# Altium PCB 矩形板V6.0(可制造).pcbdoc (part 1 of 2)
Units mil, origin at the board's own origin, x right, y up, seen from the top; angles counter-clockwise.
Board outline 3015.63 x 3960.03 mil, 2 copper layers (Top Layer, Bottom Layer); 162 components, 167 nets, 711 pads, 292 vias.
Unrouted connection lines stored in the file: 13.
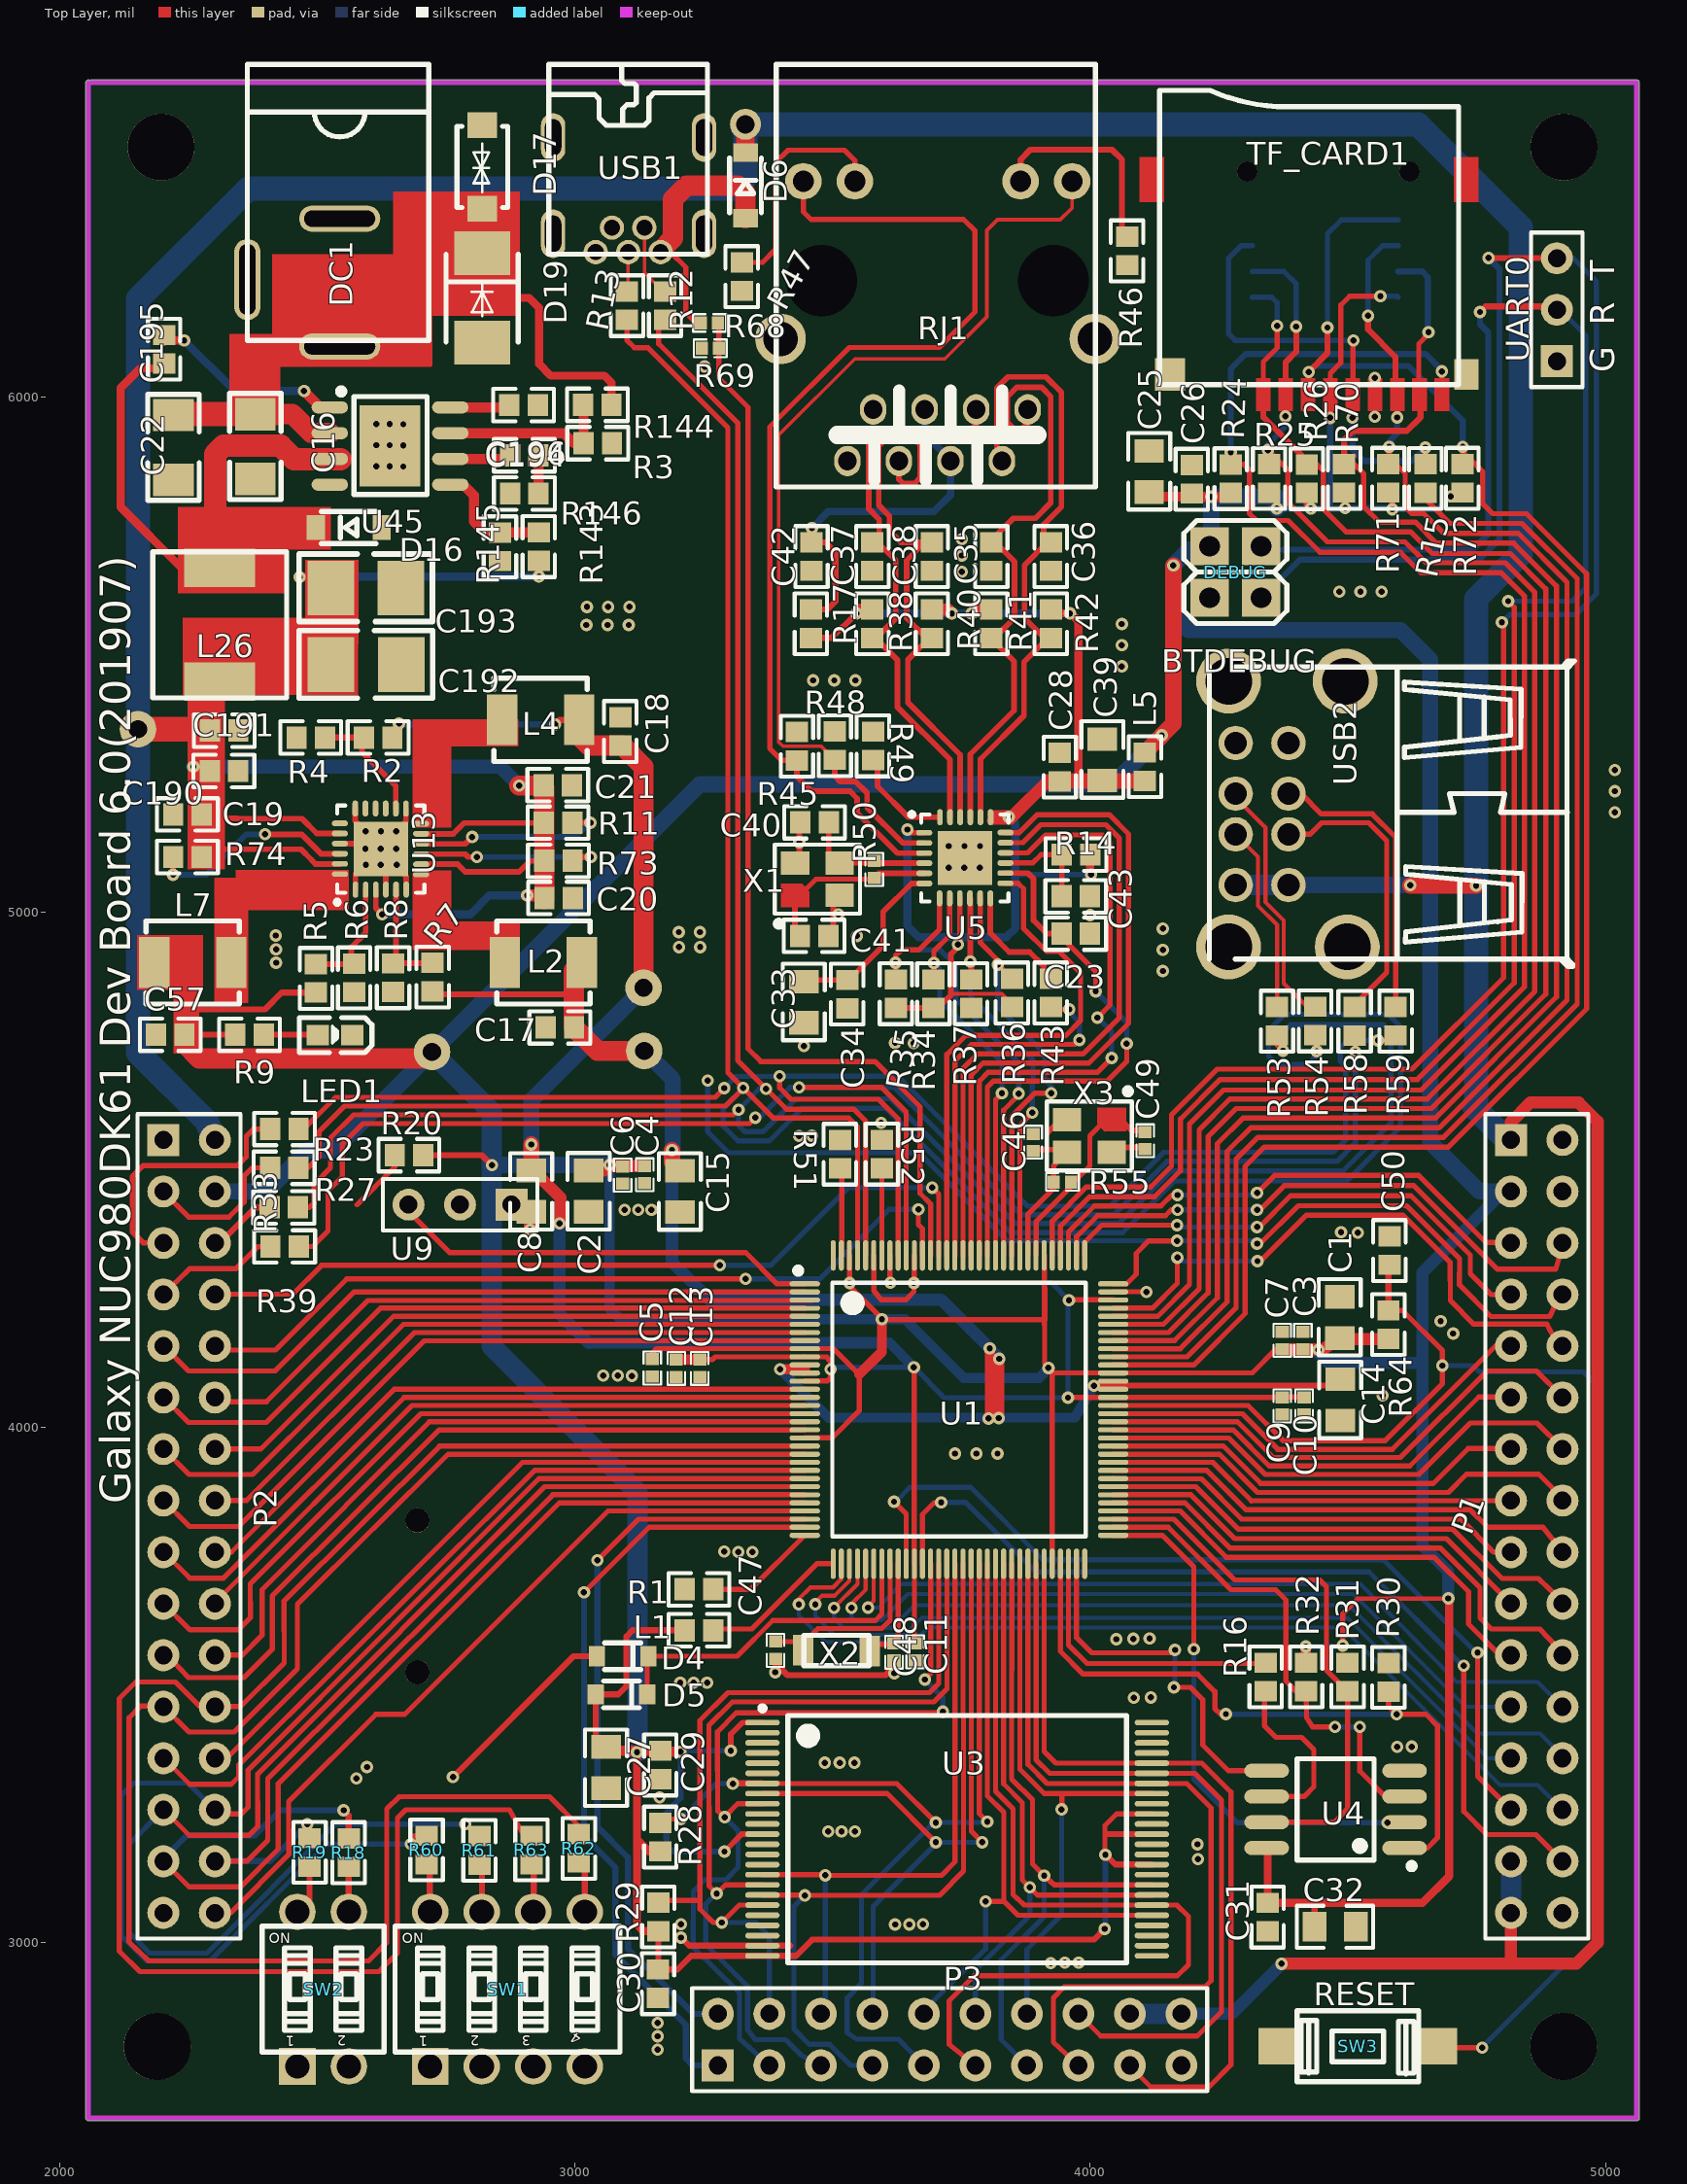
[diagram p0: Top Layer view]
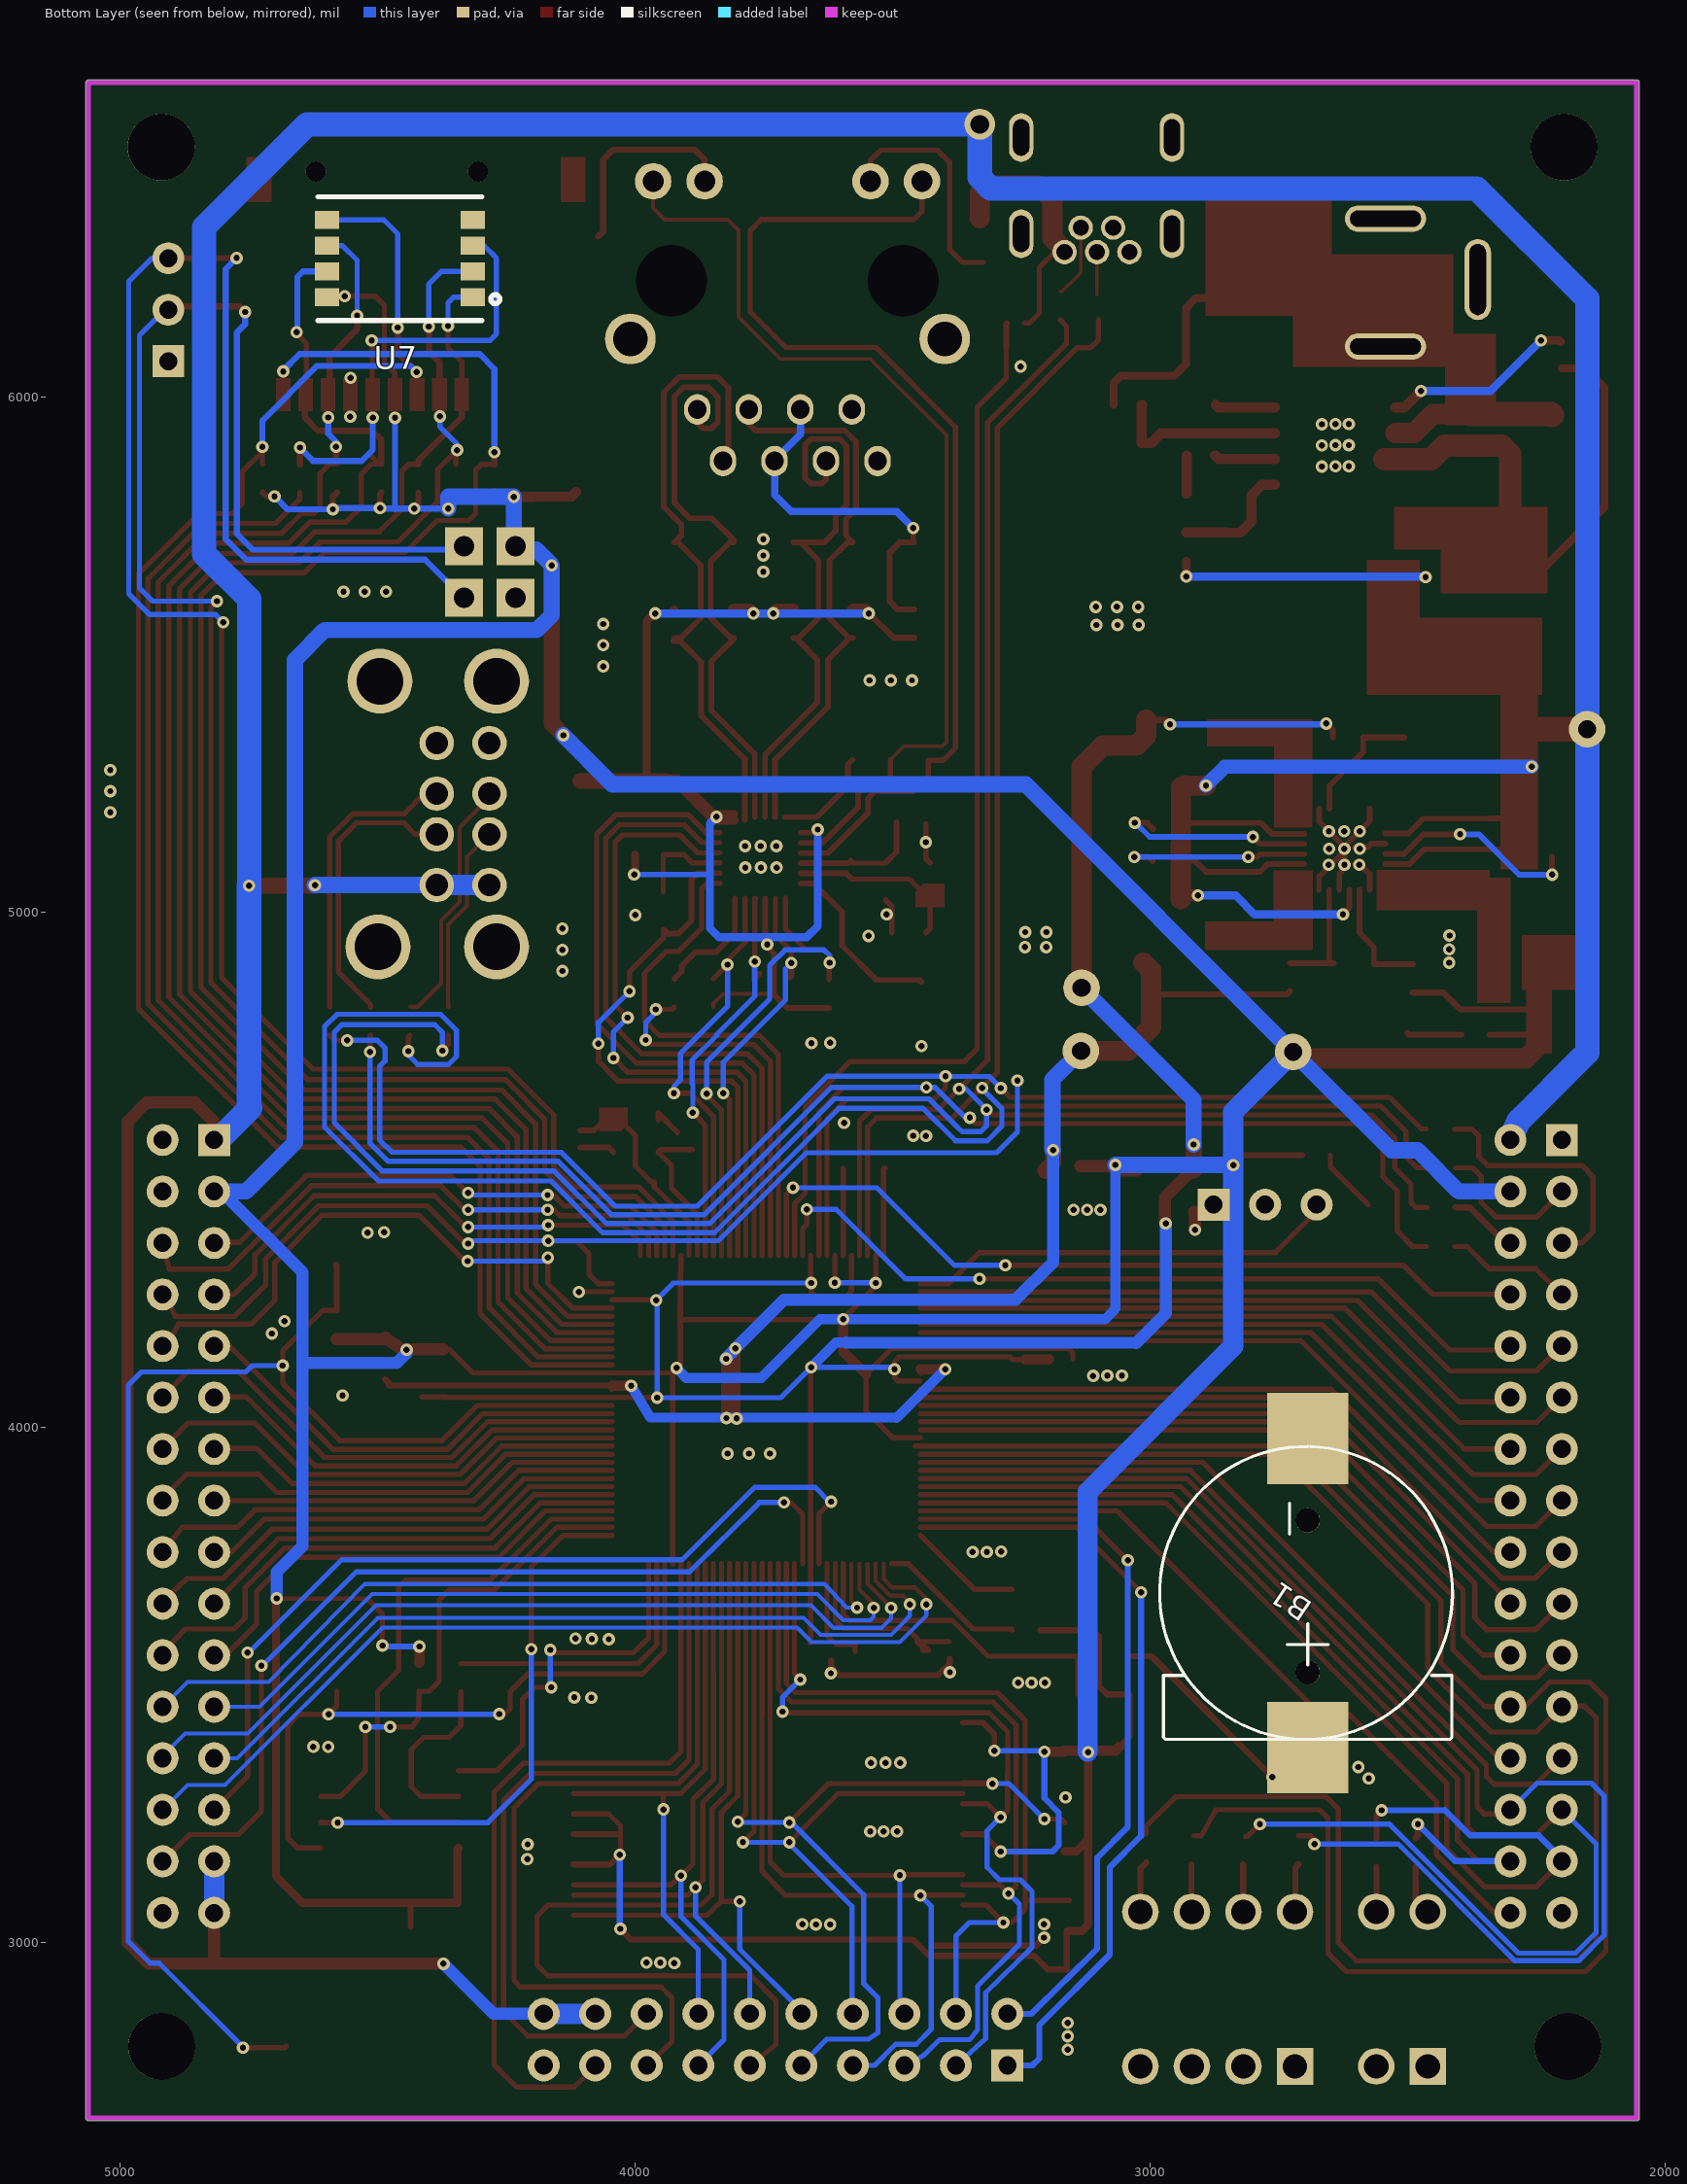
[diagram p1: Bottom Layer view, seen from below]

## Layer stack, top to bottom
Top Solder: solder mask 0.4, Solder Resist, Dk 3.5
Top Layer: signal copper 1.4
Dielectric1: dielectric 12.6, FR-4, Dk 4.8
Bottom Layer: signal copper 1.4
Bottom Solder: solder mask 0.4, Solder Resist, Dk 3.5

## Board outline
2055.22,2655.07 cw(c2055.22,2660.08) 2050.21,2660.08 2050.21,6610.08 cw(c2055.22,6610.08) 2057.72,6614.43 cw(c2060.22,6610.08) 2060.22,6615.1 5060.82,6615.1 cw(c5060.82,6610.08) 5065.84,6610.08 5065.84,2660.08 cw(c5060.82,2660.08) 5060.82,2655.07

## Design rules (kind name [scope] priority, off if disabled: settings)
Clearance [All] p1: gap=5
ComponentClearance [All] p1: gap=0 collisioncheckmode=3 verticalgap=0 showdistances=FALSE
HoleToHoleClearance [All] p1: gap=0 allowstackedmicrovias=TRUE
MinimumSolderMaskSliver [All] p1: minsoldermaskwidth=0
PolygonConnect [All] p1: connectstyle=Relief reliefconductorwidth=10 reliefentries=4 polygonreliefangle="90 Angle" airgapwidth=10
RoomDefinition 电源单元 [InComponentClass('电源单元')] p1: confinementstyle=ConfineOut formatcopy=TRUE lockcomponents=FALSE outline 6895,5570 8895,5570 8895,6570 6895,6570
RoomDefinition 接口单元 [InComponentClass('接口单元')] p2: confinementstyle=ConfineOut formatcopy=TRUE lockcomponents=FALSE outline 6710,4015 8710,4015 8710,5015 6710,5015
RoomDefinition 存储单元 [InComponentClass('存储单元')] p3: confinementstyle=ConfineOut formatcopy=TRUE lockcomponents=FALSE outline 6770,2645 8770,2645 8770,3645 6770,3645
RoomDefinition 以太网单元 [InComponentClass('以太网单元')] p4: confinementstyle=ConfineOut formatcopy=TRUE lockcomponents=FALSE outline 6745,1385 8745,1385 8745,2385 6745,2385
RoomDefinition 主控单元 [InComponentClass('主控单元')] p5: confinementstyle=ConfineOut formatcopy=TRUE lockcomponents=FALSE outline 6640,6930 8640,6930 8640,7930 6640,7930
RoutingVias [All] p1: holewidth=28 width=50 viastyle="Through Hole" minholewidth=10 minwidth=10 maxholewidth=28 maxwidth=50
SilkToSilkClearance [All] p1: silktosilkclearance=0
SilkToSolderMaskClearance [IsPad] p1: minsilkscreentomaskgap=0 clearancetoexposedcopper=TRUE
SolderMaskExpansion [All] p1: expansion=4
Width [All] p1: maxlimit=120 minlimit=7 preferedwidth=10
25 further rules are at their usual default settings.

## Classes and differential pairs
component class 主控单元: B1 C1 C2 C3 C4 C5 C6 C7 C8 C9 C10 C11 C12 C13 C14 C15 C46 C47 C48 C49 C50 D4 D5 D6 DEBUG L1 R1 R12 R13 R18 R19 R51 R52 R55 R60 R61 R62 R63 R64 R68 R69 SW1 SW2 SW3 U1 UART0 USB1 X2 X3
component class 以太网单元: C23 C28 C33 C34 C35 C36 C37 C38 C39 C40 C41 C42 C43 L5 R14 R17 R34 R35 R36 R37 R38 R40 R41 R42 R43 R45 R46 R47 R48 R49 R50 RJ1 U5 X1
component class 存储单元: C25 C26 C27 C29 C30 C31 C32 R15 R16 R24 R25 R26 R28 R29 R30 R31 R32 R70 R71 R72 TF_CARD1 U2 U3 U4 U7
component class 接口单元: P1 P2 P3 P4 R20 R23 R27 R33 R39 R53 R54 R58 R59 U9 USB2
component class 电源单元: C16 C17 C18 C19 C20 C21 C22 C57 C190 C191 C192 C193 C194 C195 C196 D16 D17 D19 DC1 L2 L4 L7 L26 LED1 R2 R3 R4 R5 R6 R7 R8 R9 R11 R73 R74 R143 R144 R145 R146 U13 U45

## Components (designator, comment, footprint, x,y, rotation, side; value= is the part's Value field where it differs from the comment)
B1 "CR1220-2" BATTERY-2 2693.93,3678.93 r270 bottom
C1 "10uF" 0805 4484.32,4213.53 r270 top
C2 "10uF" 0805 3026.29,4458.89 r90 top
C3 "100nF" 0402 4412.82,4168.69 r270 top
C4 "100nF" 0402 3134.87,4490.74 r90 top
C5 "100nF" 0402 3149.83,4115.94 r90 top
C6 "100nF" 0402 3092.35,4489.95 r90 top
C7 "100nF" 0402 4372.66,4168.69 r270 top
C8 "10uF" 0805 2914.79,4458.85 r90 top
C9 "100nF" 0402 4372.66,4041.92 r90 top
C10 "100nF" 0402 4415.18,4041.92 r90 top
C11 "100nF" 0402 3660.07,3564.76 r90 top
C12 "100nF" 0402 3196.29,4115.15 r90 top
C13 "100nF" 0402 3241.96,4115.15 r90 top
C14 "10uF" 0805 4485.26,4053.73 r90 top
C15 "10uF" 0805 3203.38,4458.46 r90 top
C16 "10uF" 1206 2379.36,5903.73 r90 top
C17 "10uF" 0603 2970.3,4776.57 r0 top
C18 "22uF" 0603 3087.63,5350.97 r270 top
C19 "10uF" 0603 2247.48,5189.95 r0 top
C20 "10uF" 0603 2967.94,5027.75 r180 top
C21 "10uF" 0603 2966.37,5246.64 r180 top
C22 "10uF" 1206 2220.31,5902.15 r90 top
C23 "15pF" 0603 3971.88,4958.45 r180 top
C25 "10uF" 0805 4114.39,5855.47 r270 top
C26 "100nF" 0603 4197.07,5840.35 r270 top
C27 "10uF" 0805 3060.19,3340.1 r90 top
C28 "100nF" 0603 3940.78,5281.68 r270 top
C29 "100nF" 0603 3165.19,3345.1 r270 top
C30 "100nF" 0603 3160.86,2920.66 r90 top
C31 "100nF" 0603 4344.32,3049.8 r270 top
C32 "10uF" 0805 4475.42,3031.06 r0 top
C33 "10uF" 0805 3443.93,4825.54 r270 top
C34 "100nF" 0603 3528.18,4841.13 r270 top
C35 "10pF" 0603 3807.96,5690.34 r270 top
C36 "10pF" 0603 3923.45,5690.34 r270 top
C37 "10pF" 0603 3577,5690.34 r270 top
C38 "10pF" 0603 3692.48,5690.34 r270 top
C39 "10uF" 0805 4023.45,5296.02 r270 top
C40 "22pF" 0603 3464.79,5174.6 r180 top
C41 "22pF" 0603 3464.01,4954.12 r180 top
C42 "22nF" 0603 3458.89,5690.34 r270 top
C43 "100nF" 0603 3971.88,5030.9 r180 top
C46 "15pF" 0402 3889.2,4553.34 r270 top
C47 "15pF" 0402 3389.2,3567.91 r90 top
C48 "15pF" 0402 3619.12,3564.36 r90 top
C49 "15pF" 0402 4106.52,4556.88 r90 top
C50 "1uF" 0603 4580.78,4343.45 r270 top
C57 "10uF" 0603 2214.01,4762.4 r0 top
C190 "10nF" 0603 2318.34,5274.2 r0 top
C191 "100nF" 0603 2318.74,5352.55 r0 top
C192 "47uF" 1210 2594.32,5480.9 r0 top
C193 "47uF" 1210 2593.93,5629.32 r0 top
C194 "10nF" 0603 2899.83,5984.44 r180 top
C195 "10nF" 0603 2202.2,6092.71 r90 top
C196 "3.3nF" 0603 2901.41,5886.8 r180 top
D4 "1N4148WS T4" SOD-323 3092.35,3556.1 r0 top
D5 "1N4148WS T4" SOD-323 3089.99,3482.08 r0 top
D6 "DSK14" SOD-123 3330.54,6410.64 r270 top
D16 "SK34WA" SOD-123F 2560.46,5746.64 r180 top
D17 "SMAJ16CA_C152120" SMA(DO-214AC)-DOB 2819.91,6446.93 r270 top
D19 "BEP0300SC" SMB(DO-214AA) 2819.52,6192.3 r90 top
DC1 "DC005-2.5MM" DC-5020 2453.38,6222.23 r270 top
DEBUG "BTDEBUG" 4PINO 4331.72,5610.42 r180 top
L1 "0Ω" 0603 3240.42,3606.48 r0 top
L2 "1.5uH" L-SMD-4.1X4.6 2938.41,4902.55 r180 top
L4 "1uH" L-SMD-4.1X4.6 2932.9,5373.42 r180 top
L5 "220Ω" 0603 4106.12,5282.48 r270 top
L7 "1.5uH" L-SMD-4.1X4.6 2257.71,4902.55 r0 top
L26 "15uH" SMD-L-7.1X6.6 2310.07,5558.06 r0 top
LED1 "19-217/GHC-YR1S2/3T" LED-0603 2534.09,4761.61 r180 top
P1 "Header-Female-2.54_2x16" HDR-16X2/2.54#1 4916.76,3758.06 r270 top
P2 "Header-Female-2.54_2x16" HDR-16X2/2.54#2 2300.63,3758.07 r270 top
P3 "Header-Female-2.54_2x10" HDR-10X2/2.54 3727,2812 r0 top
R1 "0" 0603 3240.38,3686.02 r0 top
R2 "100K" 0603 2617.55,5339.16 r0 top
R3 "47K" 0603 3043.93,5910.42 r180 top
R4 "100K" 0603 2486.84,5339.16 r0 top
R5 "510K" 0603 2497.08,4871.84 r270 top
R6 "110K" 0603 2571.09,4872.63 r90 top
R7 "200K" 0603 2723.45,4874.2 r270 top
R8 "100K" 0603 2646.68,4873.02 r90 top
R9 "1K" 0603 2367.94,4762.39 r0 top
R11 "1K" 0603 2966.76,5173.81 r0 top
R12 "27" 0603 3174.64,6177.35 r270 top
R13 "27" 0603 3100.62,6177.35 r270 top
R14 "4.7K" 0603 3972.32,5111.98 r0 top
R15 "0" 0603 4650.61,5841.93 r90 top
R16 "0" 0603 4340.38,3515.94 r90 top
R17 "0" 0603 3457.71,5560.03 r270 top
R18 "10K" 0603 2560.46,3174.99 r270 top
R19 "10K" 0603 2484.48,3175.39 r270 top
R20 "10K" 0603 2677.39,4528.54 r0 top
R23 "4.7" 0603 2435.66,4579.32 r180 top
R24 "10K" 0603 4272.66,5841.53 r270 top
R25 "10K" 0603 4347.07,5841.93 r270 top
R26 "10K" 0603 4420.3,5841.52 r270 top
R27 "4.7" 0603 2435.27,4504.13 r0 top
R28 "100K" 0603 3165.19,3205.1 r270 top
R29 "100K" 0603 3161.49,3050.15 r90 top
R30 "10K" 0603 4578.96,3515.15 r90 top
R31 "10K" 0603 4499.44,3515.94 r90 top
R32 "10K" 0603 4419.12,3515.94 r90 top
R33 "4.7" 0603 2434.48,4427.35 r0 top
R34 "4.7K" 0603 3695.5,4841.92 r90 top
R35 "4.7K" 0603 3622.67,4841.92 r90 top
R36 "4.7K" 0603 3847.86,4843.49 r90 top
R37 "4.7K" 0603 3768.73,4841.92 r90 top
R38 "49.9" 0603 3577,5560.02 r90 top
R39 "4.7" 0603 2436.05,4351.37 r180 top
R40 "49.9" 0603 3692.48,5560.03 r90 top
R41 "49.9" 0603 3807.97,5560.03 r90 top
R42 "49.9" 0603 3923.45,5560.03 r90 top
R43 "510" 0603 3923.45,4843.49 r90 top
R45 "10K" 0603 3430.54,5322.23 r270 top
R46 "470" 0603 4071.48,6283.65 r90 top
R47 "470" 0603 3323.45,6233.65 r90 top
R48 "10K" 0603 3504.16,5323.41 r270 top
R49 "12.1K" 0603 3578.18,5323.02 r270 top
R50 "1M" 0402 3580.78,5083.21 r90 top
R51 "12.1K" 0603 3514.01,4530.5 r270 top
R52 "12.1K" 0603 3595.52,4530.68 r270 top
R53 "4.7" 0603 4362.43,4788.77 r270 top
R54 "4.7" 0603 4436.44,4789.16 r270 top
R55 "1M" 0402 3945.73,4476.57 r180 top
R58 "4.7" 0603 4513.22,4788.38 r270 top
R59 "4.7" 0603 4592.74,4788.77 r270 top
R60 "10K" 0603 2711.64,3180.11 r270 top
R61 "10K" 0603 2814.4,3179.32 r270 top
R62 "10K" 0603 3007.31,3183.26 r270 top
R63 "10K" 0603 2915.19,3180.11 r270 top
R64 "100K" 0603 4578.81,4199.75 r270 top
R68 "20K" 0402 3260.86,6143.89 r180 top
R69 "39K" 0402 3262.43,6094.67 r0 top
R70 "10K" 0603 4492.74,5842.32 r270 top
R71 "10K" 0603 4578.57,5842.32 r270 top
R72 "10K" 0603 4722.27,5842.31 r270 top
R73 "1K" 0603 2967.55,5099.79 r0 top
R74 "1K" 0603 2247.47,5107.27 r0 top
R143 "52.3K" 0603 2929.36,5709.64 r270 top
R144 "100K" 0603 3043.14,5984.83 r180 top
R145 "10K" 0603 2854.16,5709.24 r90 top
R146 "6.98K" 0603 2901.41,5812.78 r0 top
RJ1 "HR911105A" RJ45-LIGHT 3703.77,6147.35 r180 top
SW1 "NDI-04H-V" NDI-04H-V 2868.73,2910.03 r0 top
SW2 "NDI-02H-V" NDI-02H-V 2510.86,2910.03 r0 top
SW3 "RESET" KEY-TOUCH-SMD-6.0*3.5*H-(A) 4519.52,2799.01 r0 top
TF_CARD1 "TF_CARD" TF-115_MRS 4682.51,6004.52 r90 top
U1 "NUC980DK61Y" LQFP-128_14X14X04P 3745.11,4034.84 r0 top
U3 "MT29F2G08ABAEAWP-IT:E" TSOP-48 3741.56,3200.98 r90 top
U4 "W25Q128JVSIQTR" SOIC-8_208MIL 4476.21,3258.85 r180 top
U5 "LAN8720AI" QFN-24_4X4X05P 3756.53,5105.81 r0 top
U7 "MKDV4GIL-AS" LGA-8_8PIN-L6.10-W8.10-PITCH0.65-TL 4456.13,6268.69 r180 bottom
U9 "3pin插针" HDR-3X1/2.54 2776.61,4432.47 r180 top
U13 "EA3059C" QFN-24_4X4X05P 2622.16,5122.62 r90 top
U45 "MP2303ADN-LF-Z" SOIC-8_EP_150MIL 2640.78,5904.91 r0 top
UART0 "2.54排针 3pin" HDR-3X1/2.54 4905.73,6169.48 r90 top
USB1 "Mini USB-B 5P-Female-TH_C46398" USB-MINI-2 3103.77,6392.6 r180 top
USB2 "Double layer DIP 90° black" USB-M-51 4383.69,5190.74 r90 top
X1 "25MHz" OSC-YSX-3225_4P 3470.3,5064.36 r0 top
X2 "32.768KHz" SMD-3215_2P 3507.31,3567.12 r0 top
X3 "12MHz" OSC-YSX-3225_4P 3998.25,4565.95 r180 top

## Footprints (in the part's own frame and the unit in brackets; to place one, negate y for a bottom-side part, rotate by r counter-clockwise, add the part's x,y. Pads: shape width x height; smd on the part's side, far side on the other; paste and mask are expansions set on the pad)
4PINO [mil]
  rect 74x74 hole 40: a(0,0) b(100,0) c(0,-100) d(100,-100)
  silkscreen extent -50,-150 150,50
0402 [mil]
  rect 23.62x25.58 smd: 1(-16.7,0) 2(16.7,0)
  silkscreen extent -32,-17 32,17
0603 [mm]
  rect 1x1.1 smd: 1(-0.7,0) 2(0.7,0)
  silkscreen extent -1.5,-0.8 1.5,0.8
0805 [mm]
  rect 1.16x1.45 smd: 1(-1.016,0) 2(1.016,0)
  silkscreen extent -1.9,-1.03 1.87,1.04
1206 [mil]
  rect 63x78.74 smd: 1(-62.99,0) 2(62.99,0)
  silkscreen extent -103,-50 103,50
1210 [mil]
  rect 90.56x106.3 smd: 1(-68,0) 2(68,0)
  silkscreen extent -130,-65 129,66
BATTERY-2 [mm]
  round 1.2 hole 1.2: 0(-3.581,0) 0(3.912,0)
  rect 4.5x4 smd: 1(7.62,0) 2(-7.62,0)
  silkscreen extent -7.22,-7.3 7.22,7.14
DC-5020 [mm]
  oval 1.3x3.999 hole 0.8 slot 3.5 at 90 deg: 1(3.15,2.275) 2(-3.15,2.275)
  oval 3.999x1.3 hole 0.8 slot 3.5 at 0 deg: 3(-0.15,-2.275)
  silkscreen extent -10.75,-2.28 2.85,6.67
HDR-3X1/2.54 [mil]
  rect 62x62 hole 35: 1(-100,0)
  round 62 hole 35: 2(0,0) 3(100,0)
  silkscreen extent -150,-50 150,50
HDR-10X2/2.54 [mil]
  rect 62x62 hole 35: 1(-450,-50)
  round 62 hole 35: 2(-450,50) 3(-350,-50) 4(-350,50) 5(-250,-50) 6(-250,50) 7(-150,-50) 8(-150,50) 9(-50,-50) 10(-50,50) 11(50,-50) 12(50,50) 13(150,-50) 14(150,50) 15(250,-50) 16(250,50) 17(350,-50) 18(350,50) 19(450,-50) 20(450,50)
  silkscreen extent -500,-100 500,100
HDR-16X2/2.54#1 [mil]
  rect 62x62 hole 35: 1(-800,-100)
  round 62 hole 35: 2(-800,0) 3(-700,-100) 4(-700,0) 5(-600,-100) 6(-600,0) 7(-500,-100) 8(-500,0) 9(-400,-100) 10(-400,0) 11(-300,-100) 12(-300,0) 13(-200,-100) 14(-200,0) 15(-100,-100) 16(-100,0) 17(0,-100) 18(0,0) 19(100,-100) 20(100,0) 21(200,-100) 22(200,0) 23(300,-100) 24(300,0) 25(400,-100) 26(400,0) 27(500,-100) 28(500,0) 29(600,-100) 30(600,0) 31(700,-100) 32(700,0)
  silkscreen extent -850,-150 750,50
HDR-16X2/2.54#2 [mil]
  rect 62x62 hole 35 copper offset 0.02,-0.01: 1(-800,-100.01)
  round 62 hole 35: 2(-800,-0.01) 3(-700,-100.01) 4(-700,-0.01) 5(-600,-100.01) 6(-600,-0.01) 7(-500,-100.01) 8(-500,-0.01) 9(-400,-100.01) 10(-400,-0.01) 11(-300,-100.01) 12(-300,-0.01) 13(-200,-100.01) 14(-200,-0.01) 15(-100,-100.01) 16(-100,-0.01) 17(0,-100.01) 18(0,-0.01) 19(100,-100.01) 20(100,-0.01) 21(200,-100.01) 22(200,-0.01) 23(300,-100.01) 24(300,-0.01) 25(400,-100.01) 26(400,-0.01) 27(500,-100.01) 28(500,-0.01) 29(600,-100.01) 30(600,-0.01) 31(700,-100.01) 32(700,-0.01)
  silkscreen extent -850,-150 750,50
KEY-TOUCH-SMD-6.0*3.5*H-(A) [mm]
  rect 1.8x1.8 smd: 1(-4,0) 2(4,0)
  silkscreen extent -3,-1.75 3,1.75
L-SMD-4.1X4.6 [mm]
  rect 1.5x2.5 smd: 1(-1.9,0) 2(1.9,0)
  silkscreen extent -2.3,-2.05 2.3,2.05
LED-0603 [mil]
  rect 43x39 smd: 1(33.5,0) 2(-33.5,0)
  silkscreen extent -72,-34 70,34
LGA-8_8PIN-L6.10-W8.10-PITCH0.65-TL [mm]
  rect 1.2x0.9 smd: 1(3.6,-1.905) 2(3.6,-0.635) 3(3.6,0.635) 4(3.6,1.905) 5(-3.6,1.905) 6(-3.6,0.635) 7(-3.6,-0.635) 8(-3.6,-1.905)
  silkscreen extent -4.05,-3.05 4.92,3.05
LQFP-128_14X14X04P [mm]
  oval 1.5x0.25 smd: 1(-7.6,6.2) 2(-7.6,5.799) 3(-7.6,5.4) 4(-7.6,5.001) 5(-7.6,4.6) 6(-7.6,4.201) 7(-7.6,3.8) 8(-7.6,3.401) 9(-7.6,3) 10(-7.6,2.601) 11(-7.6,2.2) 12(-7.6,1.801) 13(-7.6,1.4) 14(-7.6,1.001) 15(-7.6,0.599) 16(-7.6,0.201) 17(-7.6,-0.201) 18(-7.6,-0.599) 19(-7.6,-1.001) 20(-7.6,-1.4) 21(-7.6,-1.801) 22(-7.6,-2.2) 23(-7.6,-2.601) 24(-7.6,-3) 25(-7.6,-3.401) 26(-7.6,-3.8) 27(-7.6,-4.201) 28(-7.6,-4.6) 29(-7.6,-5.001) 30(-7.6,-5.4) 31(-7.6,-5.799) 32(-7.6,-6.2) 65(7.6,-6.2) 66(7.6,-5.799) 67(7.6,-5.4) 68(7.6,-5.001) 69(7.6,-4.6) 70(7.6,-4.201) 71(7.6,-3.8) 72(7.6,-3.401) 73(7.6,-3) 74(7.6,-2.601) 75(7.6,-2.2) 76(7.6,-1.801) 77(7.6,-1.4) 78(7.6,-1.001) 79(7.6,-0.599) 80(7.6,-0.201) 81(7.6,0.201) 82(7.6,0.599) 83(7.6,1.001) 84(7.6,1.4) 85(7.6,1.801) 86(7.6,2.2) 87(7.6,2.601) 88(7.6,3) 89(7.6,3.401) 90(7.6,3.8) 91(7.6,4.201) 92(7.6,4.6) 93(7.6,5.001) 94(7.6,5.4) 95(7.6,5.799) 96(7.6,6.2)
  oval 0.25x1.5 smd: 33(-6.2,-7.6) 34(-5.799,-7.6) 35(-5.4,-7.6) 36(-5.001,-7.6) 37(-4.6,-7.6) 38(-4.201,-7.6) 39(-3.8,-7.6) 40(-3.401,-7.6) 41(-3,-7.6) 42(-2.601,-7.6) 43(-2.2,-7.6) 44(-1.801,-7.6) 45(-1.4,-7.6) 46(-1.001,-7.6) 47(-0.599,-7.6) 48(-0.201,-7.6) 49(0.201,-7.6) 50(0.599,-7.6) 51(1.001,-7.6) 52(1.4,-7.6) 53(1.801,-7.6) 54(2.2,-7.6) 55(2.601,-7.6) 56(3,-7.6) 57(3.401,-7.6) 58(3.8,-7.6) 59(4.201,-7.6) 60(4.6,-7.6) 61(5.001,-7.6) 62(5.4,-7.6) 63(5.799,-7.6) 64(6.2,-7.6) 97(6.2,7.6) 98(5.799,7.6) 99(5.4,7.6) 100(5.001,7.6) 101(4.6,7.6) 102(4.201,7.6) 103(3.8,7.6) 104(3.401,7.6) 105(3,7.6) 106(2.601,7.6) 107(2.2,7.6) 108(1.801,7.6) 109(1.4,7.6) 110(1.001,7.6) 111(0.599,7.6) 112(0.201,7.6) 113(-0.201,7.6) 114(-0.599,7.6) 115(-1.001,7.6) 116(-1.4,7.6) 117(-1.801,7.6) 118(-2.2,7.6) 119(-2.601,7.6) 120(-3,7.6) 121(-3.401,7.6) 122(-3.8,7.6) 123(-4.201,7.6) 124(-4.6,7.6) 125(-5.001,7.6) 126(-5.4,7.6) 127(-5.799,7.6) 128(-6.2,7.6)
  silkscreen extent -8.07,-6.25 6.25,7
NDI-02H-V [mm]
  rect 1.8x1.8 hole 1.2: 1(-1.27,-3.81)
  round 1.8 hole 1.2: 2(1.27,-3.81) 3(1.27,3.81) 4(-1.27,3.81)
  silkscreen extent -3.01,-3.1 3.01,3.1
NDI-04H-V [mm]
  rect 1.8x1.8 hole 1.2: 1(-3.81,-3.81)
  round 1.8 hole 1.2: 2(-1.27,-3.81) 3(1.27,-3.81) 4(3.81,-3.81) 5(3.81,3.81) 6(1.27,3.81) 7(-1.27,3.81) 8(-3.81,3.81)
  silkscreen extent -5.55,-3.1 5.55,3.1
OSC-YSX-3225_4P [mm]
  round 0 smd: 1(-1.1,-0.8)
  rect 1.4x1.15 smd: 2(1.1,-0.8) 3(1.1,0.8) 4(-1.1,0.8)
  Top Layer region: -1.8,-0.225 -0.762,-0.225 -0.4,-0.604 -0.4,-1.375 -1.8,-1.375
  silkscreen extent -2.1,-2.35 2.1,1.7
QFN-24_4X4X05P [mm]
  oval 0.796x0.28 smd: 1(-2,1.232) 2(-2,0.732) 3(-2,0.231) 4(-2,-0.267) 5(-2,-0.767) 6(-2,-1.267) 13(2,-1.257) 14(2,-0.757) 15(2,-0.257) 16(2,0.241) 17(2,0.742) 18(2,1.242)
  oval 0.28x0.796 smd: 7(-1.245,-2) 8(-0.744,-2) 9(-0.244,-2) 10(0.254,-2) 11(0.754,-2) 12(1.255,-2) 19(1.27,2) 20(0.77,2) 21(0.269,2) 22(-0.229,2) 23(-0.729,2) 24(-1.229,2)
  rect 2.68x2.68 smd: 25(0,-0.013)
  silkscreen extent -2.84,-2.16 2.15,2.35
RJ45-LIGHT [mm]
  oval 1.3x1.499 hole 0.914: 1(-4.445,4.355) 2(-3.175,6.895) 3(-1.905,4.355) 4(-0.635,6.895) 5(0.635,4.355) 6(1.905,6.895) 7(3.175,4.355) 8(4.445,6.895)
  round 1.8 hole 1.04: 9(-6.625,-6.895) 10(-4.085,-6.895) 11(4.085,-6.895) 12(6.625,-6.895)
  round 2.5 hole 1.702: 13(-7.75,0.875) 14(7.75,0.875)
  round 2 hole 3.5 unplated: 15(5.715,-1.995) 16(-5.715,-1.995)
  silkscreen extent -7.78,-12.65 7.96,8.18
SMA(DO-214AC)-DOB [mil]
  rect 50x57.9 smd: 1(-81,0) 2(81,0)
  silkscreen extent -78,-49 79,49
SMB(DO-214AA) [mil]
  rect 85x108 smd: 1(-87,0) 2(87,0)
  silkscreen extent -85,-70 85,70
SMD-3215_2P [mil]
  rect 39.37x60 smd: 1(-64.88,0.95) 2(64.88,-0.95)
  silkscreen extent -63,-30 63,29
SMD-L-7.1X6.6 [mm]
  rect 3.5x1.9 smd: 1(0,2.8) 2(0,-2.8)
  silkscreen extent -3.3,-3.6 3.3,3.6
SOD-123 [mil]
  rect 35.8x48 smd: 1(64,0) 2(-64,0)
  silkscreen extent -53,-31 53,31
SOD-123F [mil]
  rect 35.8x48 smd: 1(-64,0) 2(64,0)
  silkscreen extent -53,-31 53,31
SOD-323 [mil]
  rect 31.5x39.37 smd: 1(-50,0) 2(50,0)
  silkscreen extent -35,-26 35,26
SOIC-8_208MIL [mm]
  oval 2.2x0.7 smd: 1(-3.4,1.905) 2(-3.4,0.635) 3(-3.4,-0.635) 4(-3.4,-1.905) 5(3.4,-1.905) 6(3.4,-0.635) 7(3.4,0.635) 8(3.4,1.905)
  silkscreen extent -3.9,-2.5 1.9,2.95
SOIC-8_EP_150MIL [mm]
  oval 1.798x0.6 smd: 1(-2.972,1.905) 2(-2.972,0.635) 3(-2.972,-0.635) 4(-2.972,-1.905) 5(2.972,-1.905) 6(2.972,-0.635) 7(2.972,0.635) 8(2.972,1.905)
  rect 3x4 smd: 9(0,0)
  silkscreen extent -2.56,-2.39 1.83,2.84
TF-115_MRS [mm]
  round 0 smd: 1(0,8.8) 2(0,7.7) 3(0,6.6) 4(0,5.5) 5(0,4.4) 6(0,3.3) 7(0,2.2) 8(0,1.1) 9(0,0) 11(10.6,-1.2) 12(10.6,14.3)
  rect 1.5x1.2 smd: 10(1,-1.2)
  rect 1.6x1.5 smd: 13(1,13.4)
  round 1 hole 1 unplated: ""(11,1.6) ""(11,9.6)
  Top Layer region: 9.499,-1.801 9.499,-0.6 11.699,-0.6 11.699,-1.801
  Top Layer region: 9.499,13.701 9.499,14.9 11.699,14.9 11.699,13.701
  Top Layer region: -0.8,8.451 -0.8,9.149 0.8,9.149 0.8,8.451
  Top Layer region: -0.8,7.351 -0.8,8.049 0.8,8.049 0.8,7.351
  Top Layer region: -0.8,6.251 -0.8,6.949 0.8,6.949 0.8,6.251
  Top Layer region: -0.8,5.151 -0.8,5.85 0.8,5.85 0.8,5.151
  Top Layer region: -0.8,4.049 -0.8,4.75 0.8,4.75 0.8,4.049
  Top Layer region: -0.8,2.949 -0.8,3.65 0.8,3.65 0.8,2.949
  Top Layer region: -0.8,1.849 -0.8,2.55 0.8,2.55 0.8,1.849
  Top Layer region: -0.8,0.749 -0.8,1.45 0.8,1.45 0.8,0.749
  Top Layer region: -0.8,-0.351 -0.8,0.351 0.8,0.351 0.8,-0.351
  silkscreen extent 0.5,-0.82 15,13.92
TSOP-48 [mm]
  oval 0.28x1.696 smd: 1(5.75,9.6) 2(5.25,9.6) 3(4.75,9.6) 4(4.25,9.6) 5(3.75,9.6) 6(3.25,9.6) 7(2.75,9.6) 8(2.25,9.6) 9(1.75,9.6) 10(1.25,9.6) 11(0.75,9.6) 12(0.25,9.6) 13(-0.25,9.6) 14(-0.75,9.6) 15(-1.25,9.6) 16(-1.75,9.6) 17(-2.25,9.6) 18(-2.75,9.6) 19(-3.25,9.6) 20(-3.75,9.6) 21(-4.25,9.6) 22(-4.75,9.6) 23(-5.25,9.6) 24(-5.75,9.6) 25(-5.75,-9.6) 26(-5.25,-9.6) 27(-4.75,-9.6) 28(-4.25,-9.6) 29(-3.75,-9.6) 30(-3.25,-9.6) 31(-2.75,-9.6) 32(-2.25,-9.6) 33(-1.75,-9.6) 34(-1.25,-9.6) 35(-0.75,-9.6) 36(-0.25,-9.6) 37(0.25,-9.6) 38(0.75,-9.6) 39(1.25,-9.6) 40(1.75,-9.6) 41(2.25,-9.6) 42(2.75,-9.6) 43(3.25,-9.6) 44(3.75,-9.6) 45(4.25,-9.6) 46(4.75,-9.6) 47(5.25,-9.6) 48(5.75,-9.6)
  silkscreen extent -6.1,-8.35 6.58,9.72
USB-M-51 [mm]
  round 3.2 hole 2.3: 0(-6.551,-2.925) 0(-6.551,2.925) 0(6.551,-2.826) 0(6.551,2.925)
  round 1.7 hole 1.1: 1(-3.5,2.574) 2(-1.001,2.574) 3(1.001,2.574) 4(3.5,2.574) 5(-3.5,-0.027) 6(-1.001,-0.027) 7(1.001,-0.027) 8(3.5,-0.027)
  silkscreen extent -7.52,-14.13 7.54,3.87
USB-MINI-2 [mm]
  oval 1.2x2.4 hole 0.8 slot 1.8 at 90 deg copper offset 0,0: 0(-3.72,-2.826) 0(-3.72,1.924)
  oval 1.2x2.4 hole 0.8 slot 1.8 at 90 deg copper offset -0.001,0: 0(3.72,-2.826) 0(3.72,1.924)
  round 1.2 hole 0.8: 1(-1.58,2.826) 2(-0.78,1.622) 3(0.02,2.826) 4(0.82,1.622) 5(1.62,2.826)
  silkscreen extent -3.89,-6.42 3.96,2.93

## Free pads (board coordinates)
  round 60 hole 36: 8(3330.53,6529.32)
  round 70.87 hole 35.43: 9(2151.41,5355.3) 9(2722.27,4728.93) 9(3132.9,4853.34) 9(3134.08,4730.9)
  round 130 hole 130 unplated: ""(2188.81,2798.61) ""(2196.29,6485.22) ""(4918.72,2798.61) ""(4919.51,6485.22)

## Via types
v1: diameter 24, hole 12, Top Layer to Bottom Layer, 292 vias

## Nets (pads, with @x,y where several pads share a name; then routed paths per layer and width w, separated by ;. In a path a pad name is that pad's centre, name@x,y a point inside that pad or via, vN(x,y) a via of type N, cw(c..) or ccw(c..) an arc to the next point about the centre after c; other vN are vias at no path point)
1.2V: C8.2 C9.2 C10.2 C11.2 C12.2 C13.2 C18.2 L4.1 pad.9@3132.9,4853.34 R2.2 U1.10 U1.13 U1.43 U1.82 U1.94 U1.118 U1.123 | length 5173.4
  Top Layer w9.84: U1.43@3658.59,3735.9 3658.59,3582.95 C11.2@3660.07,3581.46
  Top Layer w10: C13.2@3241.96,4131.85 3266.5,4131.85 3271.88,4137.23 3389.2,4137.23 U1.10@3445.91,4137.23
  Top Layer w10.24: U1.13@3445.99,4090.2 3488.99,4090.2 3496.09,4097.4 v1(3496.09,4113.13) 3496.09,4127.5 3488.29,4136.7 U1.10@3445.99,4137.5 ; U1.123@3579.82,4334.28 3579.82,4265.38 3593.92,4248.18 3642.52,4248.18 3657.72,4263.98 v1@3657.52,4280.48 ; v1@3657.55,4117.07 3658.59,4116.03 U1.43@3658.59,3735.9 ; v1(3657.55,4280.46) 3658.59,4281.5 U1.118@3658.59,4334.3 ; v1(3956.76,4058.01) 3957.44,4058.7 3967.89,4058.7 4044.39,4058.7 4372.58,4058.7 C9.2@4372.66,4058.62 ; v1(3958.73,4246.99) 3959.44,4247.7 U1.94@4044.39,4247.7 ; C9.2@4367.92,4059.28 C10.2@4413.22,4059.28
  Top Layer w11.81: R2.2@2645.11,5339.55 2645.11,5353.33 v1(2658.1,5366.33) ; v1(2961.25,5364.75) 2969.91,5373.41 L4.1@3007.7,5373.42
  Top Layer w19.68: C12.2@3196.29,4132.64 3197.08,4131.85 C13.2@3241.96,4131.85
  Top Layer w23.62: C8.2@2916.02,4499.98 2917.72,4499.98 2971.52,4446.28 2971.52,4397.78 v1(2969.52,4395.85)
  Top Layer w31.5: C8.2@2914.79,4498.85 2915.19,4499.24 v1(2915.19,4549.4)
  Top Layer w39.37: L4.1@3007.7,5373.42 3007.72,5342.68 3026.62,5323.78 C18.2@3087.63,5323.41 3091.52,5323.38 3132.92,5282.08 pad.9@3132.9,4853.34
  Bottom Layer w10.24: v1(3496.09,4113.13) 3500.03,4117.07 v1@3657.55,4117.07 ; v1@3657.52,4117.08 3716.42,4057.98 v1@3956.72,4057.98 ; v1(3657.55,4280.46) 3925.29,4280.5 v1(3958.73,4246.99) ; v1(3956.76,4058.01) 3956.76,4245.02 v1(3958.73,4246.99)
  Bottom Layer w11.81: v1(2658.1,5366.33) 2659.68,5364.75 v1(2961.25,5364.75)
  Bottom Layer w19.68: 3589.99,4164.78 3609.82,4164.78 v1@3657.52,4117.08
  Bottom Layer w23.62: v1(2969.52,4395.85) 2969.52,4221.45 3027,4163.97 3590.02,4164.78
  Bottom Layer w31.5: v1(2915.19,4549.4) 2915.22,4635.65 pad.9@3132.9,4853.34
  other v1: 3657.55,4117.07
1.8V: C14.2 C15.2 C17.2 L2.1 pad.9@3134.08,4730.9 R7.2 U1.11 U1.12 U1.83 U1.84 | length 3262.5
  Top Layer w10.24: U1.12@3445.91,4105.73 3445.99,4105.81 U1.12@3445.99,4106 ; U1.83@4044.31,4074.24 4044.31,4074.42 U1.83@4044.39,4074.5
  Top Layer w11.81: R7.2@2728.22,4846.68 2734.12,4840.78 2993.52,4840.78 2995.92,4843.08 ; v1(4007.31,4081.29) 4478.07,4081.29 4478.07,4086.54 C14.2@4485.26,4093.73
  Top Layer w19.68: v1(3397.71,4113.13) 3437.43,4113.14 3445.99,4113.57 ; v1(3802.59,4017.51) 3804.95,4019.88 v1(3804.95,4153.73) ; v1(3822.27,4018.3) 3823.06,4019.09 v1(3823.06,4133.26) ; v1(4007.31,4081.29) 4044.24,4081.29 4044.39,4081.14
  Top Layer w31.5: v1(3188.02,4538.37) 3188.02,4513.82 C15.2@3203.38,4498.46
  Top Layer w39.37: C17.2@2997.82,4776.58 2997.82,4887.18 L2.1@3013.22,4902.55 ; C17.2@2997.86,4776.57 3043.53,4730.89 pad.9@3134.08,4730.9
  Bottom Layer w19.68: v1@3397.72,4112.78 3492.22,4018.68 3970.32,4019.88 v1(4007.31,4081.29)
  Bottom Layer w23.62: v1(3188.02,4538.37) 3188.02,4320.98 3260.82,4248.18 3710.42,4248.18 3804.92,4153.68 3806.22,4151.68 3824.62,4133.28 v1@3823.02,4133.28
  Bottom Layer w31.5: pad.9@3134.08,4730.9 3189.62,4675.35 3189.62,4539.98 v1(3188.02,4538.37)
3.3V: C1.2 C2.2 C3.2 C4.2 C5.2 C6.2 C7.2 C25.2 C26.2 C27.2 C29.1 C30.2 C31.1 C32.1 C57.2 D5.1 DEBUG.d L1.1 L5.1 L7.1 P1.3 P2.4 R5.2 R9.1 R20.2 R24.2 R25.2 R26.2 R28.2 R29.1 R30.2 R31.2 R32.2 R64.2 R70.2 R71.2 R72.2 TF_CARD1.4 U1.9 U1.20 U1.60 U1.85 U1.102 U1.121 U1.126 U3.1 U3.12 U3.24 U3.34 U3.37 U3.39 U4.8 U7.8 | length 964.4
  Top Layer w11.81: C57.2@2241.52,4762.38 R9.1@2340.38,4762.39
  Top Layer w31.5: L5.1@4106.12,5310.04 v1@4138.81,5342.72 ; v1(4138.81,5343.49) 4161.25,5365.93 v1@4161.25,5673.42
  Top Layer w39.37: C57.2@2241.52,4745.08 2270.32,4716.28 2709.72,4716.28
  other v1: 4161.25,5673.41
+5V: C19.2 C20.2 C21.2 C190.1 C191.1 C192.1 C193.1 D6.2 L26.2 P1.1 P1.29 P1.31 P2.2 P3.18 P3.20 pad.8 pad.9@2151.41,5355.3 R11.1 R73.1 R74.2 R143.2 U13.3 U13.8 U13.11 U13.20 U13.23 USB2.1 USB2.5 | length 13088.7
  Top Layer w11.02: 2343.92,5181.68 2469.92,5181.68 2498.62,5152.88 U13.20@2543.42,5152.93 ; 2344.32,5182.08 2319.92,5182.08 2289.42,5151.58 2318.72,5122.28 2467.92,5122.28 2488.02,5102.18 2495.82,5093.88 U13.23@2543.42,5093.93 ; U13.3@2613.06,5043.89 2613.06,5008.22 v1(2625.42,4995.85) ; U13.8@2700.9,5093.32 2772.12,5093.28 2786.82,5078.58 2891.22,5078.58 2912.42,5099.78 R73.1@2930.92,5099.78 ; U13.11@2700.9,5152.32 2763.42,5152.28 2784.52,5173.38 2939.32,5173.38 R11.1@2940.92,5171.78
  Top Layer w15.75: v1(2465.19,5650.58) 2478.77,5650.58 C193.1@2527.79,5601.56 ; R143.2@2929.32,5682.08 v1@2929.72,5651.78
  Top Layer w23.62: v1(2906.92,5032.86) 2941.17,5032.86 C20.2@2941.17,5018.3 ; v1(4371.52,2959.28) 4943.52,2959.28 4984.82,3000.48 4984.82,4593.98 4948.22,4630.48 4854.12,4630.48 4816.72,4593.08 P1.1@4816.72,4558.08 ; 4816.76,2959.28 P1.31@4816.76,3058.06
  Top Layer w31.5: v1(4621.09,5052.55) 4621.88,5051.76 v1(4749.04,5051.76)
  Top Layer w35.43: D6.2@3330.54,6474.7 pad.8@3330.53,6529.32
  Top Layer w39.37: v1(2891.56,5245.85) 2930.17,5245.85 C21.2@2930.96,5246.64 ; C21.2@2940.02,5242.68 C20.2@2940.42,5025.38
  Top Layer w47.24: pad.9@2151.41,5355.3 2288.42,5355.3 C191.1@2291.18,5352.55
  Bottom Layer w15.75: v1(2465.19,5650.58) 2466.37,5651.76 v1(2929.75,5651.76) ; v1(2625.42,4995.85) 2796.71,4995.88 2833.69,5032.86 v1(2906.92,5032.86)
  Bottom Layer w23.62: P3.20@4177,2862 4274.24,2862 v1(4371.52,2959.28)
  Bottom Layer w27.56: v1(2258.89,5282.86) 2854.55,5282.86 v1(2891.56,5245.85)
  Bottom Layer w31.5: USB2.5@4384.74,5052.94 4620.7,5052.94 v1(4621.09,5052.55)
  Bottom Layer w39.37: P3.18@4077,2862 P3.20@4177,2862 ; USB2.1@4282.34,5052.94 USB2.5@4384.74,5052.94 ; P1.31@4816.76,3058.06 P1.29@4816.76,3158.06
  Bottom Layer w47.24: P2.2@2300.62,4558.07 2284.82,4594.28 2275.42,4603.68 2166.72,4712.38 2151.41,4727.69 pad.9@2151.41,5355.3 2151.41,6190.27 2366.02,6404.88 3309.32,6404.88 3330.52,6426.18 pad.8@3330.53,6529.32 4636.42,6529.28 4836.05,6329.66 4836.05,5695.51 4748.65,5608.11 4748.65,5052.15 v1(4749.04,5051.76) 4749.04,4622.69 4746.68,4620.33 4808.92,4558.08 P1.1@4816.72,4558.08
ADC_3.3V: L1.2 U1.33 | length 288.1
  Top Layer w10: L1.2@3267.92,3606.48 3267.92,3608.88 3343.02,3608.88 3469.42,3735.58 U1.33@3501.02,3735.68
DCIN: C16.2 C22.2 D17.2 D19.2 DC1.1 R144.1 U45.2 | length 830.7
  Top Layer w15.75: D19.2@2769.72,6278.18 2855.62,6192.28 2910.82,6192.28 2930.12,6172.98 2930.12,6063.98 2952.62,6041.48 3056.52,6041.48 3070.72,6027.38 R144.1@3070.7,5984.83
  Top Layer w39.37: C16.2@2379.32,5966.68 2451.02,5966.68 2487.82,5929.88 U45.2@2523.78,5929.91
  Top Layer w47.24: C22.2@2220.31,5965.15 2221.88,5966.72 C16.2@2379.36,5966.72
E3.3V: C28.2 C39.2 L5.2 R14.2 R17.2 R34.1 R35.1 R36.1 R38.2 R40.2 R41.2 R42.2 U5.1 U5.9 U5.19 | length 3038.9
  Top Layer w7.09: 3729.72,4839.58 3732.02,4841.88 3828.62,4841.88 3847.82,4822.68 R36.1@3847.82,4815.98
  Top Layer w11.02: v1(3645.11,5160.42) 3651.22,5154.31 U5.1@3677.79,5154.31 ; R34.1@3695.5,4814.36 3704.52,4814.38 3729.72,4839.58 3729.72,4919.08 3743.14,4932.5 v1(3743.14,4937.59) 3746.92,4941.37 U5.9@3746.93,5027.07
  Top Layer w11.81: R17.2@3457.71,5532.47 3497.52,5532.48 v1(3545.89,5580.1) ; R35.1@3622.67,4814.36 R34.1@3695.5,4814.36
  Top Layer w15.75: U5.19@3806.91,5177.75 3846.41,5177.75 3916.01,5247.35 C28.2@3941.11,5247.35 ; U5.19@3807.32,5177.78 v1@3846.82,5177.78 ; U5.19@3807.71,5190.31 v1@3847.18,5190.31 ; U5.19@3807.7,5190.35 3847.2,5190.35 3916.8,5259.95 C28.2@3941.91,5259.95 ; v1@3846,5184.55 3915.59,5254.13 C28.2@3940.78,5254.12 ; R42.2@3923.42,5587.58 3930.52,5580.48 3960.42,5580.08 3962.42,5580.08 3977.02,5565.58 ; 3975.85,5254.91 3976.99,5256.06 3976.99,5565.54 ; R14.2@3999.82,5112 3999.82,5075 v1(4001.4,5073.41)
  Top Layer w23.62: v1(3545.89,5580.1) 3553.37,5587.58 R38.2@3577,5587.59 ; R40.2@3692.49,5587.59 3723.85,5587.58 v1(3731.33,5580.1) ; v1(3769.91,5580.1) 3777.38,5587.58 R41.2@3807.97,5587.59
  Top Layer w30.71: C28.2@3940.78,5254.12 3941.55,5254.91 3975.85,5254.91 L5.2@4106.12,5254.92
  Bottom Layer w10: 3854.52,5073.42 v1(4001.4,5073.41)
  Bottom Layer w15.75: v1(3545.89,5580.1) v1(3960.46,5580.1) ; v1@3643.57,5160.38 v1(3645.11,5160.42) 3645.12,4972.98 3666.32,4951.78 3743.12,4951.78 ; v1(3743.14,4937.59) 3743.12,4951.78 ; v1(3743.14,4937.59) 3743.14,4951.77 ; v1@3841.52,5185.18 3854.52,5172.28 3854.52,4969.08 3837.22,4951.78 3743.12,4951.78
  other v1: 3841.56,5185.22
FB1: R2.1 R4.2 U13.14 | length 244.5
  Top Layer w11.02: R2.1@2586.42,5339.58 2586.42,5310.78 2651.92,5245.38 U13.14@2651.92,5201.38
  Top Layer w11.81: R4.2@2507.31,5339.16 R2.1@2586.42,5339.18
FB2: R7.1 R8.2 U13.5 | length 229.1
  Top Layer w11.02: R8.2@2643.14,4901.37 2727.79,4901.37 R7.1@2728.18,4901.76 ; U13.5@2652.32,5043.88 2652.32,4905.88 R8.2@2656.52,4901.78
FB3: R5.1 R6.2 U13.2 | length 231.1
  Top Layer w11.02: R6.2@2565.62,4900.18 2565.62,4932.48 2593.32,4960.28 U13.2@2593.32,5043.88
  Top Layer w11.81: R5.1@2489.99,4899.4 2564.8,4899.4 R6.2@2565.58,4900.18
GND: B1.2 C1.1 C2.1 C3.1 C4.1 C5.1 C6.1 C7.1 C8.1 C9.1 C10.1 C11.1 C12.1 C13.1 C14.1 C15.1 C16.1 C17.1 C18.1 C19.1 C20.1 C21.1 C22.1 C23.1 C25.1 C26.1 C27.1 C28.1 C29.2 C30.1 C31.2 C32.2 C33.2 C34.2 C35.2 C36.2 C37.2 C38.2 C39.1 C40.2 C41.1 C42.2 C43.1 C46.1 C47.1 C48.1 C49.1 C50.1 C57.1 C190.2 C191.2 C192.2 C193.2 C194.1 D16.1 D17.1 D19.1 DC1.2 DC1.3 DEBUG.b LED1.2 P1.2 P1.4 P1.32 P2.1 P2.31 P3.19 R1.1 R3.1 R4.1 R6.1 R8.1 R37.1 R45.1 R46.1 R47.1 R48.1 R49.1 R51.1 R52.1 R69.1 R145.1 R146.1 RJ1.8 RJ1.13 RJ1.14 SW1.1 SW1.2 SW1.3 SW1.4 SW2.1 SW2.2 SW3.1 TF_CARD1.6 TF_CARD1.10 TF_CARD1.11 TF_CARD1.12 TF_CARD1.13 U1.64 U1.95 U1.128 U3.2 U3.13 U3.23 U3.25 U3.36 U3.48 U4.4 U5.25 U7.4 U9.1 U13.1 U13.4 U13.6 U13.13 U13.18 U13.21 U13.25 U45.4 UART0.1 USB1.0 USB1.5 USB2.0 USB2.4 USB2.8 X1.2 X1.4 X3.2 X3.4 | length 1394.7
  Top Layer w9.45: U1.95@4044.31,4263.14 4044.36,4263.18 v1(4108.88,4263.18)
  Top Layer w11.02: U13.21@2543.42,5133.23 2570.72,5133.18 2577.82,5126.18 2592.74,5126.18 U13.25@2603.02,5126.18 ; U13.18@2573.26,5201.36 2573.26,5177.35 2622.67,5127.94 U13.25@2622.66,5122.62 ; U13.1@2573.62,5043.88 2573.62,5074.38 2593.92,5094.68 U13.25@2603.02,5094.68 ; U13.25@2622.62,5122.58 2622.62,5095.96 2622.62,5085.18 2632.62,5075.28 U13.4@2632.62,5043.88 ; U13.13@2671.66,5201.36 2671.66,5176.17 v1(2652.87,5157.38) 2622.67,5127.18 U13.25@2622.66,5122.62 ; U13.6@2672.06,5043.89 2672.06,5069.09 2648.83,5092.31 2622.67,5118.48 U13.25@2622.66,5122.62 ; X1.4@3426.99,5095.86 3435.18,5104.05 v1(3435.18,5136.01) C40.2@3435.18,5171.4 ; C41.1@3501.18,4960.77 3501.18,5011.48 X1.2@3513.46,5023.77 ; 3917.48,4572.96 3954.94,4610.42 X3.2@3954.94,4597.45 ; X3.4@4041.56,4534.45 4050.61,4543.49 C49.1@4106.52,4543.49
  Top Layer w11.81: v1(3205.72,3010.07) 3221.5,2994.29 U3.23@3363.61,2994.29 3417.94,2994.29 ; v1(3388.41,3524.99) 3389.2,3525.78 C47.1@3389.2,3551.21 3389.22,3541.88 3411.62,3519.48 3603.02,3519.48 3619.12,3535.58 C48.1@3619.12,3547.66 ; C48.1@3619.12,3547.66 3619.12,3523.42 v1(3619.52,3523.02)
  other v1: 3511.25,4995.85 3725.03,5086.8 3755.34,5086.8 3785.66,5086.8 2593.92,5092.31 2622.62,5092.31 2653.37,5092.31 2592.86,5123.02 2622.78,5123.02 2652.59,5123.02 3725.42,5128.53 3755.74,5128.53 3786.05,5128.53 2593.14,5157.27 2623,5157.38
GND1: R1.2 U1.32 | length 221.4
  Top Layer w10: R1.2@3267.94,3686.02 3341.2,3686.02 U1.32@3445.91,3790.74
LINK_LED: R45.2 RJ1.12 U5.3 | length 2098
  Top Layer w10: R45.2@3430.54,5294.67 3401.42,5294.68 3377.82,5318.28 3377.82,5941.98 3532.12,6096.28 3706.92,6096.28 3776.22,6165.58 3776.22,6322.58 3754.12,6344.68 3458.12,6344.68 3442.92,6359.88 RJ1.12@3442.93,6418.81
  Top Layer w11.02: R45.2@3430.54,5294.67 3430.52,5263.98 3459.72,5234.88 3533.72,5234.88 3547.42,5221.08 3547.42,5193.08 3625.62,5114.88 U5.3@3677.79,5114.91
LX1: L4.2 U13.12
LX2: L2.2 U13.7
LX3: L7.2 U13.24
NetB1_1: B1.1 D4.1 | length 376.6
  Top Layer w11.81: v1(2762.82,3321.84) 2997.08,3556.1 D4.1@3042.35,3556.1
NetC33_1: C33.1 C34.1 U5.6 | length 351.2
  Top Layer w11.02: C33.1@3443.92,4865.58 3447.12,4868.68 3531.32,4868.68 3597.82,4935.18 3597.82,5000.98 3652.82,5055.88 U5.6@3677.79,5055.91
NetC42_1: C42.1 R17.1 RJ1.4 RJ1.5 | length 714.4
  Top Layer w10.98: C42.1@3458.89,5717.91 3459.67,5718.7 v1(3459.67,5745.85)
  Top Layer w11.81: R17.1@3457.71,5587.59 3489.62,5587.58 3505.32,5603.38 3505.32,5698.98 3486.42,5717.88 C42.1@3458.89,5717.91
  Bottom Layer w13.78: v1@3459.62,5745.88 3491.52,5777.78 3696.32,5777.78 3728.72,5810.18 3728.72,5831.08 3728.72,5877.58 3678.72,5927.58 RJ1.5@3678.72,5975.88
NetC43_2: C43.2 R14.1 U5.15 | length 189.5
  Top Layer w10: U5.15@3835.22,5095.68 3888.22,5095.68 3904.52,5111.98 3945.12,5111.98 C43.2@3945.11,5039.16
NetC194_2: C194.2 U45.8 | length 117.1
  Top Layer w19.68: U45.8@2757.78,5979.91 2867.12,5979.68 C194.2@2872.62,5985.18
NetC195_1: C195.1 D16.2 L26.1 U45.3 | length 1057.3
  Top Layer w15.75: C195.1@2201.02,6055.68 2155.72,6055.68 2117.92,6017.88 2117.92,5786.38 2236,5668.3 L26.1@2310.07,5668.3
  Top Layer w43.31: L26.1@2310.02,5668.28 2301.02,5677.38 2301.02,5889.18 2317.12,5905.28 2428.62,5905.28 2454.12,5879.68 U45.3@2545.12,5879.68
NetC195_2: C195.2 U45.1 | length 376.5
  Top Layer w15.75: C195.2@2202.2,6106.88 2204.95,6109.63 v1(2241.17,6109.63)
  Top Layer w19.68: v1(2473.85,6011.99) 2505.93,5979.91 U45.1@2523.78,5979.91
  Bottom Layer w15.75: v1(2241.17,6109.63) 2338.81,6012 v1@2473.85,6012
NetC196_1: C196.1 R146.2 | length 74
  Top Layer w19.68: R146.2@2928.97,5812.78 C196.1@2928.97,5886.8
NetC196_2: C196.2 U45.6 | length 118.9
  Top Layer w19.68: U45.6@2757.78,5879.91 2866.72,5879.68 C196.2@2873.85,5886.8
NetD6_1: D6.1 R68.2 USB1.1 | length 506.6
  Top Layer w10: USB1.1@3165.92,6281.38 3185.22,6281.38 3214.82,6251.78 3214.82,6162.78 3233.72,6143.88 R68.2@3244.12,6143.88
  Top Layer w39.37: USB1.1@3165.92,6281.38 3165.92,6284.38 3189.62,6308.08 3189.62,6383.68 3216.32,6410.38 3316.02,6410.38 3330.52,6395.88 D6.1@3330.52,6346.68
NetLED1_1: LED1.1 R9.2 | length 106.4
  Top Layer w11.81: R9.2@2395.5,4762.39 2497.42,4762.38 LED1.1@2500.52,4765.58
NetP2_3: P2.3 R27.1 | length 297.5
  Top Layer w10: P2.3@2201.02,4458.48 2201.02,4456.88 2249.42,4408.48 2328.22,4408.48 2357.32,4437.58 2357.32,4487.98 2373.42,4504.08 R27.1@2407.71,4504.13
NetP2_5: P2.5 R23.2 | length 512.2
  Top Layer w10: P2.5@2206.92,4358.48 2201.02,4358.48 2161.62,4358.48 2140.42,4379.68 2140.42,4487.18 2161.62,4508.48 2344.72,4508.48 2361.62,4525.38 2361.62,4565.58 2375.42,4579.28 R23.2@2408.1,4579.32
NetP2_6: P2.6 R33.1 | length 134.4
  Top Layer w11.81: P2.6@2301.02,4358.48 2310.42,4358.48 2379.32,4427.38 R33.1@2406.92,4427.35
NetP2_7: P2.7 R39.2 | length 245.8
  Top Layer w10: P2.7@2201.01,4258.45 2251.42,4308.08 2341.22,4308.08 2384.52,4351.38 R39.2@2408.49,4351.37
NetR3_2: R3.2 R144.2 U45.7 | length 341.3
  Top Layer w19.68: U45.7@2757.78,5929.91 2978.42,5929.88 2997.82,5910.38 R3.2@3016.32,5910.38 ; R144.2@3015.58,5984.83 3016.37,5984.06 R3.2@3016.37,5910.42
NetR11_2: R11.2 U13.10 | length 386
  Top Layer w11.02: U13.10@2700.9,5132.62 2786.61,5132.63 v1@2800.23,5146.25
  Top Layer w11.81: R11.2@2994.32,5161.98 3005.72,5173.38 v1@3029.72,5173.78
  Bottom Layer w11.02: v1(2800.23,5146.25) 3001.02,5146.28 3028.62,5173.78 v1@3029.72,5173.78
  other v1: 3029.75,5173.81
NetR12_1: R12.1 USB1.2 | length 142.5
  Top Layer w6.3: USB1.2@3134.47,6328.75 3134.46,6241.54 3141.17,6234.83 3171.09,6204.91 R12.1@3174.64,6204.91
NetR13_1: R13.1 USB1.3 | length 82.8
  Top Layer w6.3: R13.1@3102.96,6198.49 USB1.3@3102.96,6281.34
NetR16_1: R16.1 U4.6 | length 352.5
  Top Layer w10: R16.1@4338.02,3486.78 4338.02,3421.1 4360.49,3398.58 4410.49,3398.58 4434.08,3374.99 4434.08,3302.95 4414.99,3283.85 U4.6@4342.35,3283.85
NetR18_2: R18.2 SW2.3 | length 89.5
  Top Layer w11.81: R18.2@2560.46,3147.43 2560.46,3058.46 SW2.3@2560.85,3058.07
NetR19_2: R19.2 SW2.4 | length 99.6
  Top Layer w11.81: SW2.4@2460.85,3058.07 2484.48,3081.7 R19.2@2484.48,3147.83
NetR20_1: R20.1 U9.3 | length 126.4
  Top Layer w10: 2576.61,4432.47 2649.83,4505.69 R20.1@2649.83,4528.54
NetR43_2: R43.2 U5.12 | length 227.8
  Top Layer w11.02: U5.12@3805.93,5027.07 3805.92,4959.88 3842.72,4922.98 3882.12,4922.98 3909.32,4895.88 3909.32,4885.18 R43.2@3923.42,4871.08
NetR46_2: R46.2 RJ1.10 | length 408.6
  Top Layer w11.81: RJ1.10@3864.59,6418.81 3864.62,6460.58 3884.02,6480.08 4042.32,6480.08 4061.62,6460.88 4061.62,6321.08 R46.2@4071.48,6311.22
NetR47_2: R47.2 RJ1.11 | length 457.4
  Top Layer w10: R47.2@3323.45,6261.22 3364.02,6261.18 3389.22,6286.38 3389.22,6455.28 3413.22,6479.28 3522.62,6479.28 3542.92,6459.08 RJ1.11@3542.93,6418.81
NetR49_2: R49.2 U5.24 | length 200.5
  Top Layer w11.02: R49.2@3578.18,5295.46 3586.82,5286.78 3586.82,5244.68 3646.92,5184.58 U5.24@3708.12,5184.58
NetR60_2: R60.2 SW1.8 | length 95.1
  Top Layer w11.81: R60.2@2711.64,3152.55 2717.92,3146.28 SW1.8@2717.92,3060.08
NetR61_2: R61.2 SW1.7 | length 91.7
  Top Layer w11.81: SW1.7@2819.12,3060.08 R61.2@2819.12,3151.78
NetR62_2: R62.2 SW1.5 | length 100.4
  Top Layer w11.81: R62.2@3007.31,3155.7 3018.72,3144.28 3018.72,3063.98 SW1.5@3018.73,3060.03
NetR63_2: R63.2 SW1.6 | length 92.5
  Top Layer w11.81: SW1.6@2918.32,3059.28 2919.52,3094.68 2919.52,3106.1 R63.2@2919.92,3151.78
NetR73_2: R73.2 U13.9 | length 370.6
  Top Layer w11.02: U13.9@2700.9,5113.02 2786.62,5112.98 2792.32,5107.28 v1(2809.28,5107.27)
  Top Layer w11.81: R73.2@2995.11,5099.79 3002.58,5107.27 v1(3030.54,5107.27)
  Bottom Layer w11.02: v1(2809.28,5107.27) v1(3030.54,5107.27)
NetR74_1: R74.1 U13.22 | length 406.3
  Top Layer w11.02: v1@2398.22,5151.38 2468.72,5151.38 2506.52,5113.58 U13.22@2543.42,5113.62
  Top Layer w11.81: v1(2219.52,5073.02) R74.1@2219.91,5107.27
  Bottom Layer w11.02: v1(2219.52,5073.02) 2283.3,5073.02 2361.65,5151.37 v1(2398.26,5151.37)
NetR143_1: R143.1 R145.2 U45.5 | length 239.9
  Top Layer w19.68: U45.5@2757.78,5829.91 2782.72,5829.88 2803.42,5809.28 2803.42,5758.48 2825.02,5736.78 R145.2@2854.12,5736.78 ; R145.2@2854.12,5737.19 R143.1@2929.36,5737.19
PA0: P2.9 U1.2 | length 1328.8
  Top Layer w10: P2.9@2201.02,4158.48 2249.82,4109.68 2417.62,4109.68 2570.92,4263.18 U1.2@3445.92,4263.18
PA1: P2.12 U1.3 | length 1252.7
  Top Layer w10: P2.12@2288.02,4050.18 2401.02,4050.18 2597.52,4246.68 U1.3@3459.32,4246.68
PA2: P2.11 U1.4 | length 1356.9
  Top Layer w10: P2.11@2201.02,4058.48 2249.52,4009.98 2400.22,4009.98 2621.92,4231.78 U1.4@3445.92,4231.78
PA3: P2.14 U1.5 | length 1251.6
  Top Layer w10: P2.14@2301.02,3958.48 2390.02,3958.48 2647.52,4215.98 U1.5@3445.92,4215.98
PA4: P2.13 U1.6 | length 1385.7
  Top Layer w10: P2.13@2201.02,3958.48 2250.72,3908.88 2373.92,3908.88 2666.82,4200.28 U1.6@3445.92,4200.28
PA5: P2.16 U1.7 | length 1279.9
  Top Layer w10: P2.16@2301.02,3858.48 2362.02,3858.48 2687.92,4184.38 U1.7@3445.92,4184.48
PA6: P2.15 U1.8 | length 1414.8
  Top Layer w10: P2.15@2201.02,3858.48 2251.42,3808.08 2346.62,3808.08 2707.02,4168.18 U1.8@3445.92,4168.78
PA7: P2.18 U1.14 | length 1275.7
  Top Layer w10: P2.18@2301.02,3758.48 2332.92,3758.48 2648.72,4074.28 U1.14@3445.92,4074.28
PA8: P2.17 U1.15 | length 1411.2
  Top Layer w10: P2.17@2201.02,3758.48 2251.82,3707.68 2317.12,3707.68 2668.02,4058.48 U1.15@3445.92,4058.48
PA9: P2.20 U1.16 | length 1308.1
  Top Layer w10: P2.20@2301.02,3658.48 2299.02,3658.48 2683.32,4042.78 U1.16@3445.92,4042.78
PA10: P2.19 U1.17 | length 1478.5
  Top Layer w10: P2.19@2201.02,3658.48 2252.22,3607.28 2345.92,3607.28 2369.62,3630.98 2369.22,3696.38 2700.32,4026.98 U1.17@3445.92,4026.98
PA11: P2.22 U1.18 | length 1384.6
  Top Layer w10: P2.22@2301.02,3558.48 2354.22,3558.48 2392.32,3596.88 2392.32,3684.88 2717.02,4011.28 U1.18@3445.92,4011.28
PA12: P2.21 U1.19 | length 1523.9
  Top Layer w10: P2.21@2200.22,3558.48 2208.02,3558.48 2249.32,3514.78 2357.02,3514.58 2412.12,3569.38 2412.02,3673.28 2736.52,3995.48 U1.19@3445.92,3995.48
PB0: P2.32 U1.29 | length 1528.2
  Top Layer w10: P2.32@2301.02,3058.48 2331.32,3058.48 2444.12,3171.18 2443.82,3273.78 2613.12,3443.28 2669.42,3443.38 3064.02,3837.98 U1.29@3445.92,3837.98
PB1: P1.26 U1.36 | length 1689.1
  Top Layer w7.87: v1@3504.12,3652.18 3548.22,3696.18 U1.36@3548.21,3735.64
  Bottom Layer w7.87: v1(3502.59,3649.79) 3502.62,3630.08 3521.52,3611.18 3614.42,3611.18 3658.52,3655.28 4502.22,3655.28 4751.42,3406.08 4873.06,3406.1 P1.26@4921.12,3358.08
PB2: P1.24 U1.38 | length 1559.9
  Top Layer w7.87: v1@3567.94,3652.16 3579.71,3663.93 U1.38@3579.71,3735.64
  Bottom Layer w7.87: v1(3568.73,3650.58) 3588.92,3650.58 3632.22,3696.28 4524.02,3696.28 4711.22,3505.98 4868.32,3506.08 4916.72,3458.08 P1.24@4921.12,3458.08
PB3: P1.23 U1.37 | length 1510.5
  Top Layer w7.87: v1@3537.22,3652.18 3537.22,3658.48 3564.02,3685.18 U1.37@3564.01,3735.64
  Bottom Layer w7.87: v1@3536.42,3649.78 3536.42,3632.48 3542.72,3626.18 3595.52,3626.18 3645.92,3676.58 4510.02,3676.58 4728.62,3458.08 P1.23@4821.12,3458.08
  other v1: 3536.45,3649.79
PB4: P3.1 U1.31 | length 1535.3
  Top Layer w10: v1(3017.15,3680.11) 3143.62,3806.58 U1.31@3445.92,3806.58
  Bottom Layer w11.81: v1(3017.15,3680.11) 3017.15,3207.28 3078.18,3146.26 3078.18,2976.97 3214.79,2840.35 3214.79,2775.78 3228.57,2762 P3.1@3277,2762
PB5: P1.25 U1.35 | length 1639.6
  Top Layer w7.87: v1(3466.37,3656.88) 3466.37,3660.82 3475.03,3669.48 3478.97,3673.42 3503.38,3673.42 3532.51,3702.55 U1.35@3532.51,3735.64
  Bottom Layer w7.87: v1@3466.32,3656.88 3466.32,3634.88 3482.12,3618.28 3502.62,3597.78 3639.62,3597.78 3672.62,3630.88 4499.02,3630.88 4771.92,3358.08 P1.25@4821.12,3358.08
PB6: P3.2 U1.30 | length 1440.8
  Top Layer w10: v1(3043.14,3742.31) 3123.11,3822.28 U1.30@3445.92,3822.28
  Bottom Layer w11.81: v1(3043.14,3742.31) 3043.14,3225.06 3102.62,3165.58 3102.78,2988.24 3230.34,2861.99 P3.2@3277,2862
PB7: P1.28 U1.34 | length 1826.8
  Top Layer w7.87: v1(3434.08,3656.88) 3434.12,3667.08 3456.52,3689.58 3500.62,3689.58 3516.82,3705.78 U1.34@3516.81,3735.64
  Bottom Layer w7.87: v1(3434.08,3656.88) 3434.12,3635.58 3486.02,3583.68 3656.92,3583.68 3685.22,3611.98 4489.62,3611.98 4795.42,3306.08 4868.32,3306.08 4916.72,3258.08 P1.28@4921.12,3258.08
PB8: P1.27 U1.42 | length 1743.8
  Top Layer w9.84: v1(3619.12,3856.09) 3642.71,3832.5 U1.42@3642.71,3735.64 ; P1.27@4816.76,3258.06 P1.27@4821.09,3258.06
  Top Layer w10: v1(4751.8,3563.18) 4751.8,3323.02 P1.27@4816.76,3258.06
  Bottom Layer w9.84: v1@3619.12,3855.78 3622.32,3855.78 3649.82,3883.78 3767.92,3883.78 3908.12,3743.48 4569.12,3743.48 4749.32,3563.28 v1(4751.8,3563.18)
PB13: P1.10 U1.93 | length 1142.6
  Top Layer w10: U1.93@4044.31,4231.73 4120.75,4231.74 4169.12,4280.11 v1(4169.12,4329.71) ; v1(4324.63,4323.02) 4330.12,4322.98 4419.52,4412.38 4606.82,4412.38 4698.82,4320.38 4699.02,4246.38 4744.62,4200.58 4886.52,4200.58 4909.42,4158.08 P1.10@4921.12,4158.08
  Bottom Layer w10: v1(4169.12,4329.71) 4175.81,4323.02 v1(4324.63,4323.02)